# EAGLE board c_del_4smd1 (EAGLE 7.2.0)
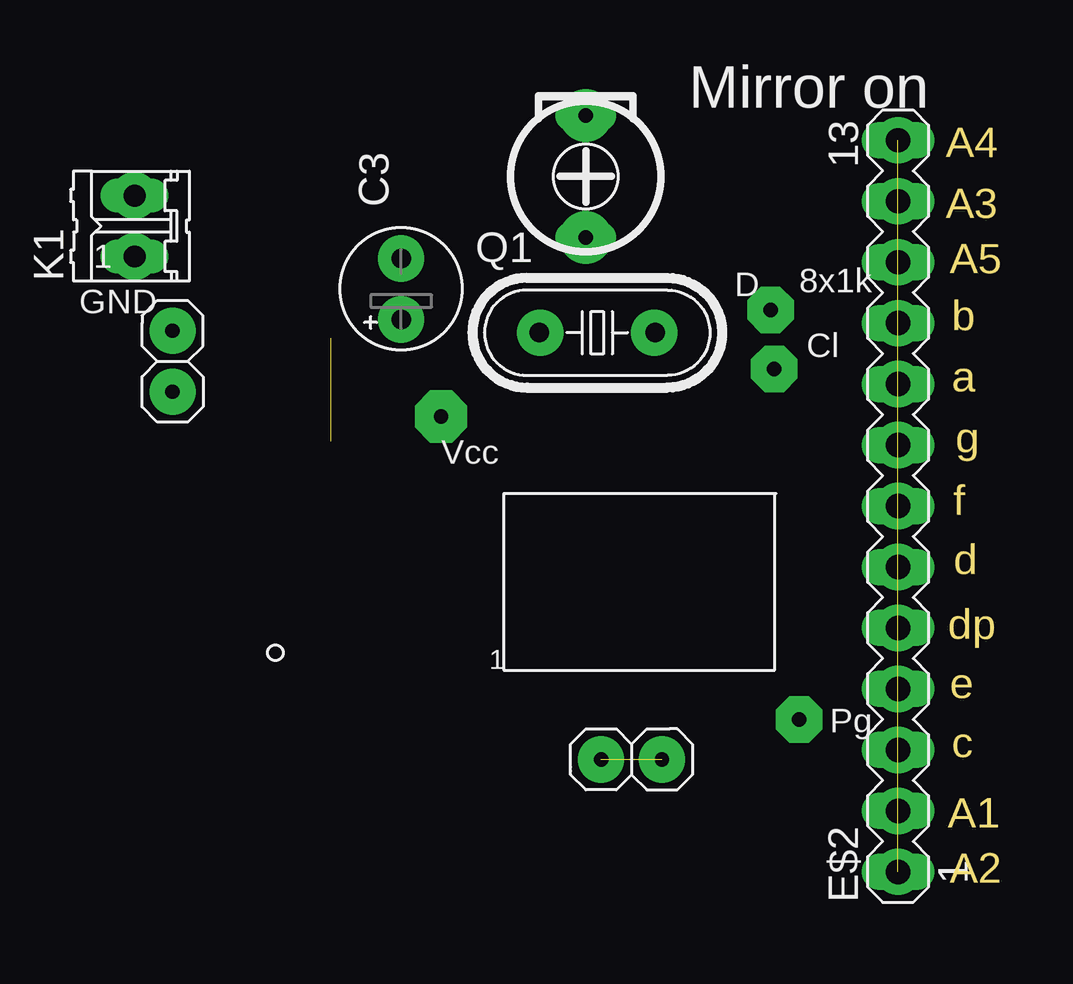
[diagram p0: board, top side]
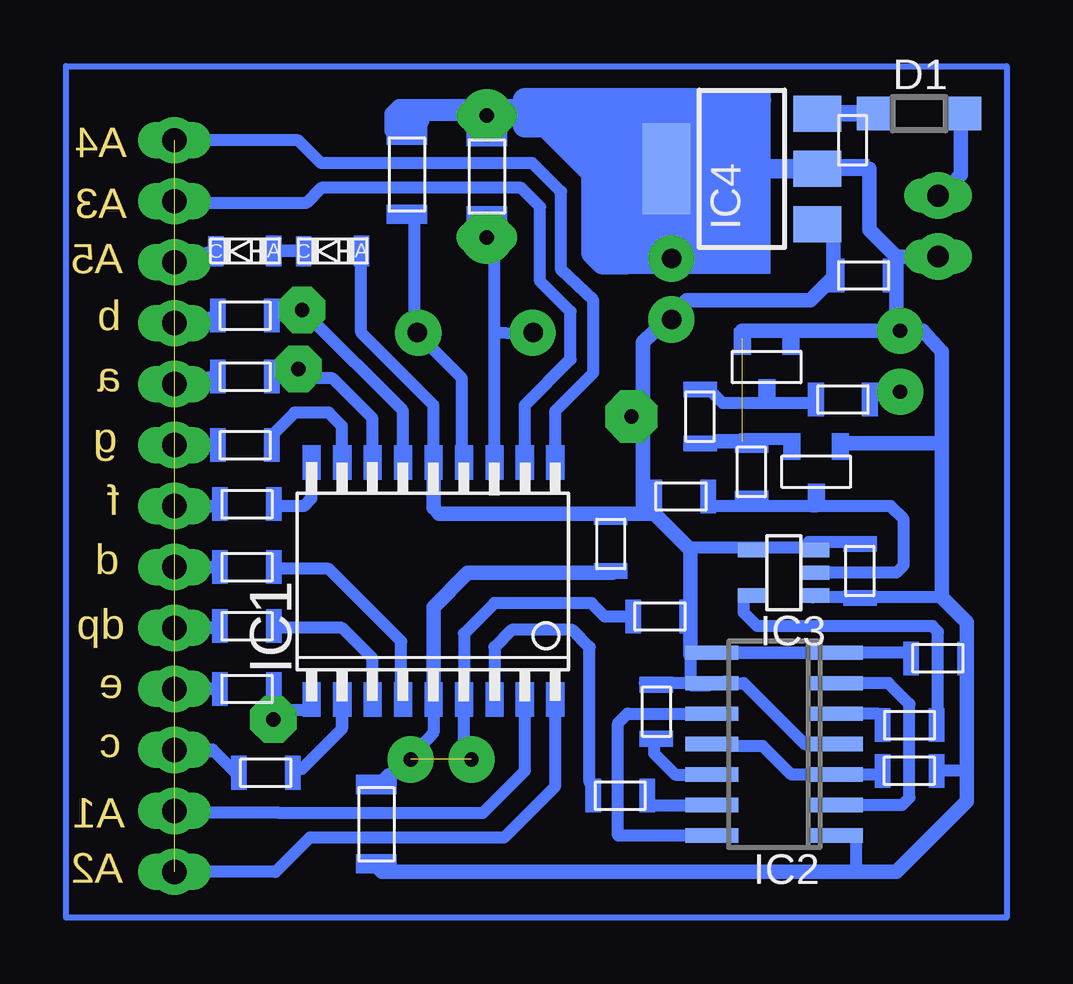
[diagram p1: board, bottom side, seen from below]

No outline drawn. Coordinates in mm, seen from the top.
Copper layers (1*16): Top 0.035mm / dielectric 1.5mm / Bottom 0.035mm
Design rules "default": minimum track width 10mil, minimum drill 24mil, track to track 8mil, track to pad 8mil, pad to pad 8mil, via to via 8mil, smd to smd 8mil, copper to edge 40mil, drill to drill 8mil, minimum pad ring 10mil, minimum via ring 8mil, stop-mask expansion 0mil, vias tented up to drill 0mil, thermal gap 10mil

## Footprints (pad centres in the part's own frame; a part is rotated, then mirrored left to right if it is on the bottom)
E2,5-5 = drill 0.813 pad 1.6: + -1.27,0 | drill 0.813 pad 1.6 octagon: - 1.27,0
SOD123 = smd 1.4 x 1.4: A 1.9,0; C -1.9,0
MA13-1 = drill 1.016 long: 1 -15.24,0; 2 -12.7,0; 3 -10.16,0; 4 -7.62,0; 5 -5.08,0; 6 -2.54,0; 7 0,0; 8 2.54,0; 9 5.08,0; 10 7.62,0; 11 10.16,0; 12 12.7,0; 13 15.24,0
C_TRIM = drill 0.6 pad 1.27 long: P$1 0,2.54; P$2 0,-2.54 | drill 0.6 pad 1.778: P$3 0,2.54; P$4 0,-2.54
MA02_1,7 = drill 0.6 pad 1.778: P$1 -1.27,0; P$2 1.27,0
SO-14R = smd 0.6 x 2.2 bottom: 1 -3.81,-2.6; 2 -2.54,-2.6; 3 -1.27,-2.6; 4 0,-2.6; 5 1.27,-2.6; 6 2.54,-2.6; 7 3.81,-2.6; 8 3.81,2.6; 9 2.54,2.6; 10 1.27,2.6; 11 0,2.6; 12 -1.27,2.6; 13 -2.54,2.6; 14 -3.81,2.6
SOT23-5 = smd 0.6 x 1.2: 1 -0.95,-1.306; 2 0,-1.306; 3 0.95,-1.306; 4 0.95,1.306; 5 -0.95,1.306
SOT223 = smd 1.5 x 2: 1 -2.3,-3.15; 2 0,-3.15; 3 2.3,-3.15 | smd 3.8 x 2: 4 0,3.15
02P = drill 0.914 long: 1 -1.27,0; 2 1.27,0
HC49U-V = drill 0.813 octagon: 1 -2.413,0; 2 2.413,0

## Placement (x,y rotation side)
C3  47uF  [E2,5-5]  13.97,26.19 90 top
D1  Sh-d  [SOD123]  3.65,33.5 0 bottom
D2  [D-805]  28.1,27.78 0 bottom
D3  [D-805]  31.75,27.78 0 bottom
D4-5  BAV70  [SOT23A]  10,22.94 180 bottom
E$2  [MA13-1]  34.69,17.15 90 top
E$3  10p  [C1206A]  21.67,30.88 270 bottom
E$4  5-25p  [C_TRIM]  21.67,30.88 0 top
E$5  1k  [C0805A]  31.75,25.08 0 bottom
E$7  680R  [C0805A]  13.57,17.54 180 bottom
E$8  100n  [C0805A]  6.11,14.45 270 bottom
E$10  [MA02_1,7]  23.57,6.59 0 top
E$12  1k  [C0805A]  31.75,22.54 0 bottom
E$13  1k  [C0805A]  31.75,19.68 0 bottom
E$14  1k  [C0805A]  31.67,17.22 0 bottom
E$15  1k  [C0805A]  31.67,14.61 0 bottom
E$16  1k  [C0805A]  31.67,12.14 0 bottom
E$17  1k  [C0805A]  31.67,9.53 0 bottom
E$18  1k  [C0805A]  30.88,6.03 180 bottom
E$23  10k  [C0805A]  14.45,12.54 180 bottom
E$25  0R0  [C1206A]  26.27,3.89 270 bottom
E$26  470R  [C0805A]  4.05,6.11 180 bottom
E$28  100n  [C0805A]  2.86,10.8 180 bottom
E$30  47k  [C0805A]  10.64,18.57 270 bottom
E$31  100n  [C0805A]  6.43,32.39 90 bottom
E$32  100n  [C0805A]  5.95,26.75 180 bottom
E$33  4u7  [C0805A]  6.83,21.59 0 bottom
E$34  0R0  [C0805A]  4.05,8.02 0 bottom
E$35  100n  [C0805A]  16.51,15.56 90 bottom
E$39  18p  [C1206A]  25,30.96 270 bottom
E$40  0R0  [C0805A]  14.61,8.57 90 bottom
E$41  0R0  [C0805A]  16.11,5.08 0 bottom
E$42  [MA02_1,7]  4.45,23.18 90 top
E$43  4u7  [C0805A]  12.78,20.88 270 bottom
IC1  F628A  [SO-18W_R]  23.89,14.05 0 top
IC2  ACT74  [SO-14R]  9.68,7.22 270 top
IC3  xHC123  [SOT23-5]  9.29,14.37 90 bottom
IC4  78M05  [SOT223]  11.03,31.19 90 bottom
K1  [02P]  2.86,28.81 90 top
Q1  20MHz  [HC49U-V]  22.15,24.37 0 top
T1  HF-N  [SOT23A]  7.94,18.57 180 bottom

## Library data of the parts
C3 = rcl
D1-D3 = diode1
D4-5 T1 = transistor-npn1
E$2 = con-lstb
E$3 E$5 E$7 E$8 E$12-E$18 E$23 E$25 E$26 E$28 E$30-E$35 E$39-E$41 E$43 = rcl_upr
E$4 = con-moje
E$10 E$42 = con-lstb1
IC1 IC2 = microchip
IC3 = burr-brown
IC4 = v-reg
K1 = con-amp-quick
Q1 = crystal

## Nets
S$4: E$2.3
S$9: E$2.4
S$11: E$10.P$1
S$13: E$2.5
S$14: E$2.6
S$15: E$2.7
S$18: E$2.8
S$20: E$2.9
S$21: E$2.10
S$33: E$2.11

## Tracks (layer width: path | path; a pad name or v marks a point on that pad's centre or on a via)
KON1  (via drill 0.6 pad 1.93)
  other vias: 13.97,24.92 2.86,30.08 2.86,27.54
S$1
  Bottom 0.5: 26.99,31.43 28.57,31.43 29.53,32.38 34.69,32.38
S$2
  Bottom 0.5: 24.84,6.67 23.89,7.7 23.89,9.05 23.89,10.64
  Bottom 0.61: 23.89,9.05 23.89,12.94 22.46,14.37 16.43,14.37
S$3  (via drill 0.6 pad 2.18)
  other vias: 15.64,20.88
S$4
  Bottom 0.53: 33.1,6.99 E$2.3
S$5  (via drill 0.6 pad 1.93)
  other vias: 29.37,25.32
S$6
  Bottom 0.53: 29.53,27.78 30.4,27.78
S$7
  Bottom 0.406: 6.43,8.49 6.35,8.49
S$8
  Bottom 0.5: 5.4,8.49 6.67,8.49
S$9
  Bottom 0.53: 33.1,9.53 E$2.4
S$10
  Bottom 0.5: 6.43,9.76 4.92,9.76 4.05,8.89 4.05,5 4.37,4.68 6.59,4.68
S$11
  Bottom 0.5: E$10.P$1 22.62,6.91 22.62,9.05
S$12
  Bottom 0.5: 29.05,18.89 28.97,18.81 28.97,17.46 29.29,17.14 30.56,17.14
S$13
  Bottom 0.53: 33.1,12.06 E$2.5
S$14
  Bottom 0.53: E$2.6 33.18,14.61
S$15
  Bottom 0.53: 33.02,17.14 E$2.7
S$16
  Bottom 0.5: 27.7,19.29 27.7,20.48 28.26,21.03 29.69,21.03 30.64,20.08 30.64,19.53
  Bottom 0.61: 30.64,19.53 30.64,19.84
S$17
  Bottom 0.5: 27.7,9.37 27.7,7.86
S$18
  Bottom 0.53: 33.1,19.68 E$2.8
S$19
  Bottom 0.5: 23.89,19.37 23.89,21.35 26.91,24.37 26.91,27.7
S$20
  Bottom 0.53: 33.1,22.54 E$2.9
S$21
  Bottom 0.53: 33.1,25 E$2.10
S$22
  Bottom 0.5: 22.7,19.29 22.7,22.46 24.69,24.45 24.69,29.45
S$23
  Bottom 0.5: 26.43,18.89 26.43,20.8 28.1,22.46 30.56,22.46
S$24
  Bottom 0.5: 26.43,9.45 26.43,10.79 27.7,12.06 30.4,12.06
S$25
  Bottom 0.5: 30.56,9.6 30.48,9.53 30.48,8.97 30.16,8.65 28.89,8.65
S$26  (1 unrouted)
  Bottom 0.61: 11.03,19.84 12.06,19.84
S$27
  Bottom 0.5: 12.94,8.49 15.8,8.49 16.19,8.1 16.19,3.41 12.86,3.41
S$28
  Bottom 0.5: 22.15,3.33 20.95,3.33 18.81,5.48 18.81,8.97
S$29
  Bottom 0.5: 25.16,19.29 25.16,21.11 29.13,25.08 30.48,25.08
S$30
  Bottom 0.406: 6.59,11.03 6.67,11.11 9.21,11.03 12.46,11.11
S$31  (via drill 0.6 pad 1.93)
  other vias: 29.53,22.86
S$32
  Bottom 0.5: 19.84,24.29 21.19,24.37
S$33
  Bottom 0.53: 33.1,27.78 E$2.11
S$34
  Bottom 0.61: 15.16,23.97 13.34,25.72 8.18,25.72 7.22,26.67 7.22,28.65
S$35
  Bottom 0.5: 25.16,9.21 25.24,9.29 25.24,11.51 28.26,14.53 30.48,14.53
S$36
  Bottom 0.5: 21.35,18.97 21.35,28.26
S$37
  Bottom 0.61: 16.35,33.5 25.56,33.5
S$38
  Bottom 0.5: 21.83,4.37 23.57,4.37 30.32,4.37 34.85,4.37
S$39  (via drill 0.6 pad 1.93)
  other vias: 30.56,8.26
S$40
  Bottom 0.5: 20.08,19.37 20.08,21.35 18.18,23.26 18.18,25.24 19.45,26.51 19.45,29.61 20.24,30.4 28.57,30.4 29.21,29.77 34.85,29.77
S$41
  Bottom 0.5: 11.59,7.14 10.16,7.14 8.97,5.95 7.62,5.95
S$42
  Bottom 0.5: 29.84,6.03 29.69,6.19 29.37,6.19 27.7,7.86 27.7,8.97
S$43
  Bottom 0.5: 29.05,3.33 | 29.05,3.33 30.48,1.91 34.69,1.91 | 20.95,3.33 29.05,3.33
S$44
  Bottom 0.5: 21.75,4.45 20.08,6.11 20.08,8.81
S$45
  Bottom 0.5: 9.05,19.92 11.11,19.92
S$46
  Bottom 0.5: 32.15,6.03 33.02,6.91 34.29,6.91
S$47
  Bottom 0.5: 14.92,4.68 13.26,4.68
S$48
  Bottom 0.5: 13.02,5.95 13.81,5.95 14.68,6.83 14.68,7.3
S$49
  Bottom 0.5: 4.37,21.83 5.79,21.83
S$50
  Bottom 0.5: 12.7,9.76 15.08,9.76
S$51
  Bottom 0.25: 0,0 39.21,0 39.21,35.48 0,35.48 0,0
S$52  (via drill 0.6 pad 2.18)
  other vias: 21.67,28.34
S$53
  Bottom 0.5: 11.67,9.76 11.75,9.84
S$54
  Bottom 0.5: 18.81,19.37 18.81,21.11 17.22,22.7 17.22,25.72 18.57,26.99 18.57,30.24 19.76,31.43 28.57,31.43
S$55  (via drill 0.6 pad 1.93)
  other vias: 13.97,27.46
S$56
  Bottom 1.016: 15.88,27.3 16.83,27.3 17.22,27.7 17.22,31.04 19.13,32.94 19.13,33.97 17.07,33.97 | 17.07,33.97 14.53,33.97 15.32,33.18 18.49,33.18 17.22,31.91 16.75,31.91 17.22,32.38 17.22,33.02 20.08,33.02 20.08,33.89 | 17.14,34.05 17.07,33.97 | 17.14,34.05 20.08,34.05 | 10.32,34.05 17.14,34.05
S$57
  Bottom 0.5: 8.02,21.43 10.64,21.43
S$58
  Bottom 0.61: 2.06,29.92 2.06,30.8 1.91,30.96 1.91,33.34
S$59  (via drill 0.6 pad 2.18)
  other vias: 21.67,33.42
S$61  (via drill 0.6 pad 1.93)  (1 unrouted)
  other vias: 22.3,6.59 24.84,6.59 4.45,21.91 4.45,24.45
S$62
  Bottom 0.5: 7.54,7.22 8.41,7.22 10.95,9.76 12.3,9.76 12.38,9.68 13.18,9.68 13.18,10.95 | 3.97,11.03 7.14,11.03
  Bottom 0.53: 6.35,11.03 7.14,11.03 13.18,11.03 | 13.18,11.03 13.18,10.95 | 13.18,11.03 13.18,12.94
  Bottom 0.61: 23.89,18.89 23.89,17.07 23.65,16.83 15.16,16.83 | 15.16,16.83 14.68,16.83 13.18,15.32 13.18,10.95 | 15.16,16.83 15.16,23.97
S$63
  Bottom 0.61: 16.91,33.81 25.32,33.81 25.64,33.5 25.64,33.18
S$64  (via drill 0.6 pad 1.93)
  other vias: 24.53,24.37
S$65
  Bottom 0.61: 7.7,31.11 7.78,31.2 8.18,30.96
  Bottom 0.813: 7.78,31.2 13.49,31.2
S$66  (via drill 0.6 pad 1.93)
  other vias: 19.76,24.37
S$69  (via drill 0.6 pad 1.93)  (12 unrouted)
  other vias: 34.69,32.38 34.69,29.84 34.69,27.3 34.69,24.77 34.69,22.23 34.69,19.69 34.69,17.15 34.69,14.61 34.69,12.07 34.69,9.53 34.69,6.99 34.69,4.45 34.69,1.91
S$70
  Bottom 0.5: 21.35,9.53 21.35,11.27 20.64,11.99 18.1,11.99 17.38,11.27 17.38,5.64 17.3,5.56
S$71
  Bottom 0.5: 22.62,9.21 22.62,11.83 21.35,13.1 17.3,13.1 16.75,12.54 15.48,12.54
S$72
  Bottom 0.5: 5.32,5.95 6.11,5.95
S$73
  Bottom 0.5: 1.83,6.11 2.78,6.11
S$74
  Bottom 0.5: 10.95,13.41 10.95,12.7 10.4,12.14 3.1,12.14 2.86,11.91 2.86,8.57
S$75
  Bottom 0.5: 7.62,15.4 13.18,15.4
S$78
  Bottom 0.5: 26.19,5.56 25.8,5.95 25.24,6.27
S$79
  Bottom 0.5: 11.03,24.45 11.11,24.45 | 6.27,1.91 6.27,3.41 | 2.7,13.34 8.1,13.34
  Bottom 0.61: 4.6,24.45 11.03,24.45 | 4.6,24.45 4.6,27.46 | 4.37,24.45 4.29,24.37 | 4.37,24.45 4.6,24.45 | 4.37,24.45 3.49,24.45 2.7,23.57 2.7,19.76 | 2.7,19.76 6.91,19.76 | 26.27,2.14 26.04,1.91 6.27,1.91 4.6,1.91 1.67,4.84 1.67,12.3 2.7,13.34 2.7,19.76
S$81
  Bottom 0.61: 2.78,27.54 4.6,27.54 5.71,28.65 5.71,31.19 6.83,31.19
S$83
  Bottom 0.406: 35,29.84 34.69,29.84
S$85
  Bottom 0.5: 5.87,15.64 8.26,15.64 8.26,15.4
S$87
  Bottom 0.5: 8.18,17.14 7.86,17.14 | 8.18,17.14 4.84,17.14 4.29,16.59 4.29,14.68 4.6,14.37 7.7,14.37 | 8.18,17.14 12.22,17.14 12.46,17.3 12.46,17.94 | 11.83,21.43 12.38,21.99 | 9.92,21.43 11.75,21.43 | 15.16,20.8 15.72,20.8
S$102
  Bottom 0.61: 24.37,33.18 25.56,33.18
S$103
  Bottom 0.61: 25.64,32.78 25.64,33.34
(copper drawn outside any net)
  shapes: Bottom area x1

## Text on the board
Dimension: A4 | A3 | A5 | b | a | g | f | d | dp | e | c | A1 | A2
tPlace: Mirror on | D | 8x1k | GND | Cl | Vcc | Pg